# Altium PCB fisica_PCB2.PcbDoc
Units mm, origin at the board's own origin, x right, y up, seen from the top; angles counter-clockwise.
Board outline 82 x 32 mm, 2 copper layers (Top Layer, Bottom Layer); 16 components, 7 nets, 36 pads, 0 vias.
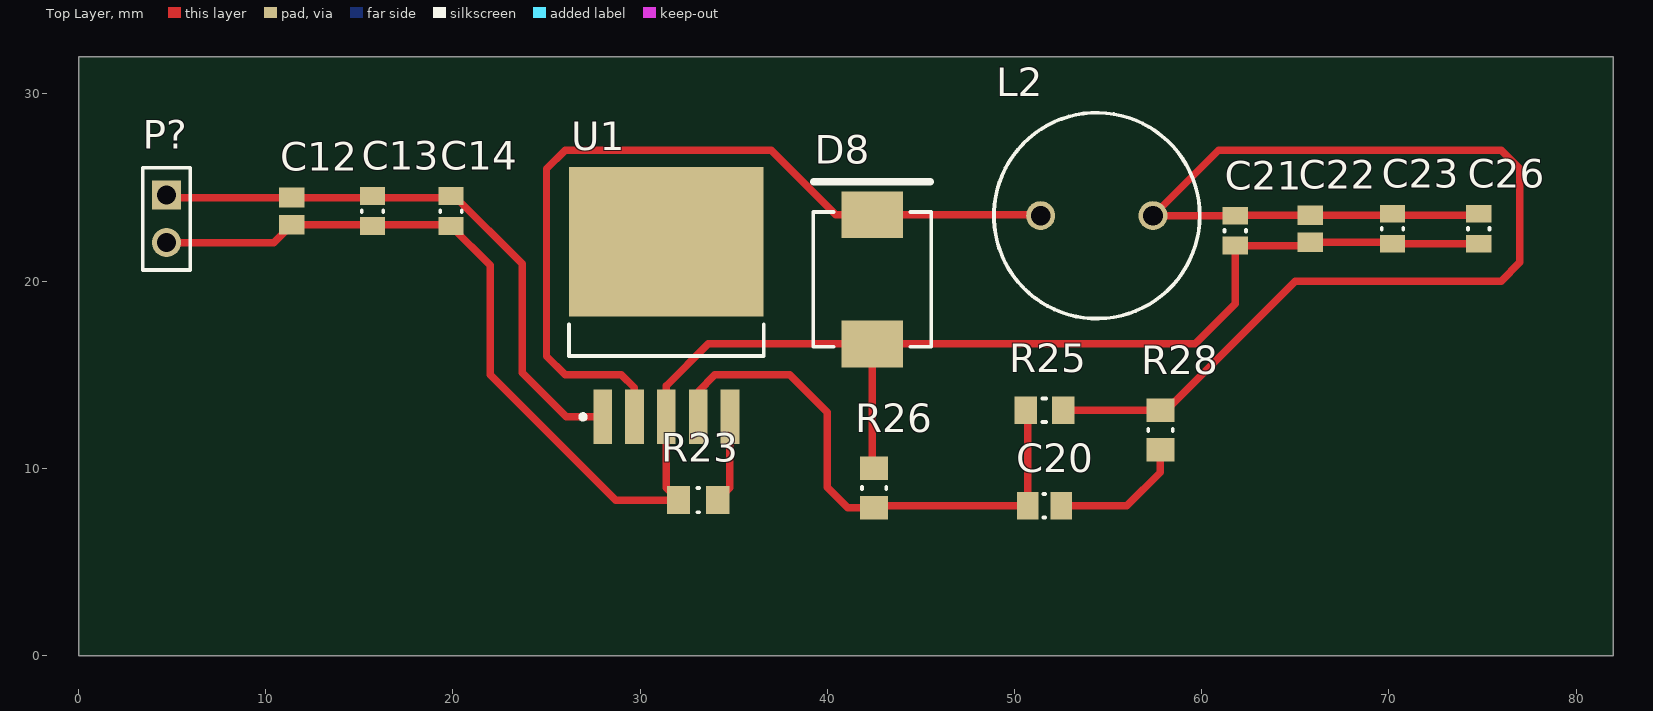
[diagram p0: Top Layer view]
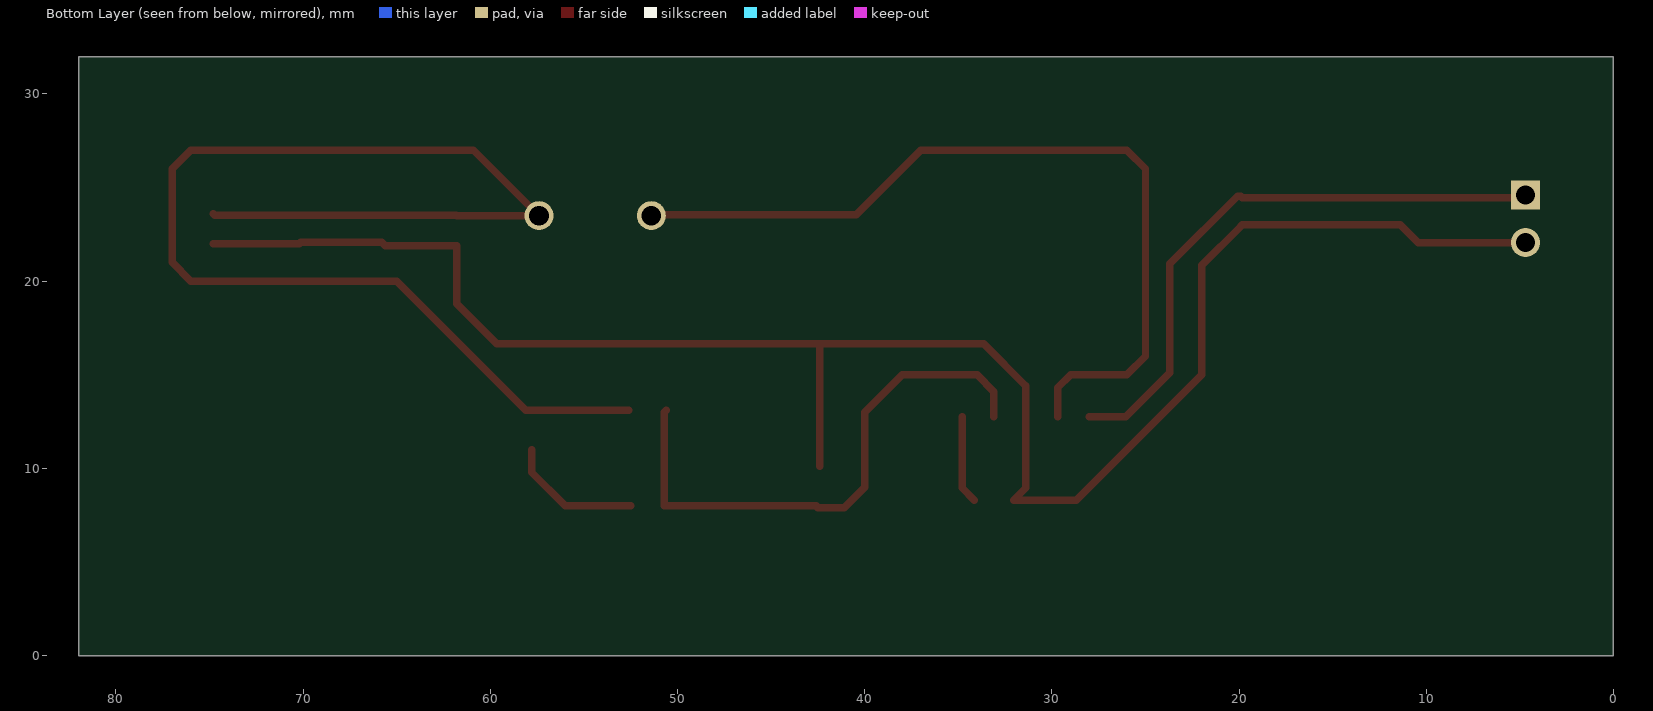
[diagram p1: Bottom Layer view, seen from below]

## Layer stack, top to bottom
Top Solder: solder mask 0.0102, Solder Resist, Dk 3.5
Top Layer: signal copper 0.0356
Dielectric 1: dielectric 0.32, FR-4, Dk 4.8
Bottom Layer: signal copper 1
Bottom Solder: solder mask 0.0102, Solder Resist, Dk 3.5

## Board outline
0,0 82,0 82,32 0,32

## Design rules (kind name [scope] priority, off if disabled: settings)
Clearance [All] p1: gap=0.25 ignorepadtopadclearanceinfootprint=TRUE
PolygonConnect [All] p1: connectstyle=Relief reliefconductorwidth=0.254 reliefentries=4 polygonreliefangle="90 Angle" airgapwidth=0.254
RoutingVias [All] p1: holewidth=0.711 width=1.27 viastyle="Through Hole" minholewidth=0.711 minwidth=1.27 maxholewidth=0.711 maxwidth=1.27
SolderMaskExpansion [All] p1: expansion=0.102
Width [All] p1: maxlimit=0.5 minlimit=0.254 preferedwidth=0.4
30 further rules are at their usual default settings.

## Components (designator, comment, footprint, x,y, rotation, side; value= is the part's Value field where it differs from the comment)
C12 "crear 100uF" CAPC2013X145X45LL20T25 11.39,23.743 r90 top
C13 "22nF  0805" CAPC0805(2012)100_L 15.708,23.742 r90 top value=22nF
C14 "470nF 0805" CAPC0805(2012)100_L 19.899,23.742 r90 top value=1uF
C20 "3.3nF 0805" CAPC0805(2012)100_N 51.6,8 r0 top value=3.3nF
C21 "470nF 0805" CAPC0805(2012)100_L 61.8,22.7 r90 top value=1uF
C22 "crear  330uF" CAPC2013X145X45LL20T25 65.8,22.8 r90 top
C23 "220nF 100V 0805" CAPC0805(2012)75_L 70.2,22.8 r90 top value=220nF
C26 "470nF 0805" CAPC0805(2012)100_L 74.8,22.8 r90 top value=1uF (schematic designator C24)
D8 "B550C-13-F" DIOD-SMC-2-A_V 42.4,20.1 r90 top
L2 "crear" COIL-RFB1010-2_V 54.4,23.5 r0 top
P? "TSW-102-26-L-S" SMTC-TSW-102-26-XX-S 4.7,24.6 r270 top
R23 "1K  0805" RESC0805(2012)_M 33.1,8.3 r0 top value="1780.00 Ohm"
R25 "3.3k 0805" RESC2013X60X35ML10T20 51.6,13.1 r0 top
R26 "1K  0805" RESC0805(2012)_M 42.5,8.95 r270 top value="1780.00 Ohm"
R28 "100  0805" RESC0805(2012)_M 57.8,12.05 r90 top value="1780.00 Ohm"
U1 "LM2596SX-12" TS5B_L 31.4,18.7 r90 top

## Footprints (in the part's own frame and the unit in brackets; to place one, negate y for a bottom-side part, rotate by r counter-clockwise, add the part's x,y. Pads: shape width x height; smd on the part's side, far side on the other; paste and mask are expansions set on the pad)
CAPC0805(2012)75_L [mm] "Chip Capacitor, Body 2.0x1.2mm, Height 0.75mm, IPC High Density"
  rect 0.95x1.35 smd: 1(-0.8,0) 2(0.8,0)
  silkscreen extent -0.05,-0.58 0.05,0.58, body extent -1.1,-0.72 1.1,0.72, height 0.75
CAPC0805(2012)100_L [mm] "Chip Capacitor, Body 2.0x1.2mm, Height 1.0mm, IPC High Density"
  rect 0.95x1.35 smd: 1(-0.8,0) 2(0.8,0)
  silkscreen extent -0.05,-0.58 0.05,0.58, body extent -1.1,-0.72 1.1,0.72, height 1
CAPC0805(2012)100_N [mm] "Chip Capacitor, Body 2.0x1.2mm, Height 1.0mm, IPC Medium Density"
  rect 1.15x1.45 smd: 1(-0.9,0) 2(0.9,0)
  silkscreen extent -0.05,-0.62 0.05,0.63, body extent -1.1,-0.72 1.1,0.73, height 1
CAPC2013X145X45LL20T25 [mm] "Chip Capacitor, 2-Leads, Body 2.00x1.25mm, IPC High Density"
  rect 1.05x1.35 smd: 1(-0.725,0) 2(0.725,0)
  body extent -1.1,-0.72 1.1,0.72, height 1.45
COIL-RFB1010-2_V [mm] "Radial Leaded, 2-Leads, Dia 11mm, Height 11.5mm, Pin Spacing 6mm"
  round 1.55 hole 1.05: 1(-3,0) 2(3,0)
  Mechanical 13 keep-out circle w0.1: c0,0 r5.5
  silkscreen extent -5.5,-5.5 5.5,5.5, body extent -5.5,-5.5 5.5,5.5, height 11.5
DIOD-SMC-2-A_V [mm] "Molded Diode, 2-Leads, Body 7.11 x 6.22 mm"
  rect 2.5x3.3 smd: 1(-3.45,0) 2(3.45,0)
  silkscreen extent -3.6,-3.15 5.2,3.15, body extent -3.77,-3.11 3.77,3.11, height 2.5
RESC0805(2012)_M [mm] "Chip Resistor, Body 2.0x1.3mm, IPC Low Density"
  rect 1.25x1.5 smd: 1(-1.05,0) 2(1.05,0)
  silkscreen extent -0.05,-0.65 0.05,0.65, body extent -1.1,-0.67 1.1,0.67, height 0.7
RESC2013X60X35ML10T20 [mm] "Chip Resistor, 2-Leads, Body 2.1x1.35mm, IPC Low Density"
  rect 1.2x1.45 smd: 1(-1,0) 2(1,0)
  silkscreen extent -0.1,-0.63 0.1,0.63, body extent -1.05,-0.68 1.05,0.67, height 0.6
SMTC-TSW-102-26-XX-S [mm] ".025 SQ Post Terminal Strip Assembly, 1x2 Pins, Vertical, 2.54mm Pitch, Male"
  rect 1.55x1.55 hole 1.02: 1(0,0)
  round 1.55 hole 1.02: 2(2.54,0)
  silkscreen extent -1.46,-1.27 4,1.27, body extent -1.4,-1.27 3.81,1.27, height 8.38
TS5B_L [mm] "D2-PAK, 6-Leads, Body 8.6x10.2mm, Pitch 1.7mm, Lead Span 14.1mm, IPC High Density"
  rect 2.9x1 smd: 1(-5.95,3.4) 2(-5.95,1.7) 3(-5.95,0) 4(-5.95,-1.7) 5(-5.95,-3.4)
  rect 8x10.4 smd: 6(3.4,0)
  silkscreen extent -6.07,-5.2 -1,5.2, body extent -2.7,-5.2 6.19,5.2, height 4.65

## Part data
C12 C22: library part CMP-2000-07599-1, "Chip Capacitor, 100 uF, +/- 20%, 6.3 V, -55 to 85 degC, 0805 (2012 Metric), RoHS, Tape and Reel", Capacitance=100uF, Case/Package=0805, Case Code (Metric)=2012, Dielectric=X5R, Manufacturer=Murata, Max Operating Temperature=85degC, Min Operating Temperature=-55degC, Package Description="2-Pin Surface Mount Device, Body 2 x 1.25 mm", Package Reference=805, Tolerance=20%, Voltage Rating=6.3V, Case Code (Imperial)=0805, Datasheet URL=http://search.murata.co.jp/Ceramy/image/img/A01X/G101/ENG/GRM21BR60J107ME15-01.pdf, Datasheet Version=03/2016, Lead Free=LeadFree, Length=0.079inch, Manufacturer URL=http://www.murata.com/, Mount=SurfaceMount, Mounting Technology=SurfaceMount, Packaging=CutTape, REACH SVHC=NoSVHC, RoHSCompliant=True, Thickness=0.057inch, Voltage Rating (DC)=6.3V, Width=0.049inch
C13: library part CMP-1036-04079-1, "CAP 22nF 100V ±20% 0805 (2012 Metric) Thickness 1mm SMD", Case-EIA=0805, Case-Metric=2012, Rated Voltage="100 V", Tolerance=±20%, Max Thickness="1 mm", Technology=SMT
C14 C21 C26: library part CMP-1036-04734-1, "CAP 1uF 6.3V ±20% 0805 (2012 Metric) Thickness 1mm SMD", Case-EIA=0805, Case-Metric=2012, Rated Voltage="6.3 V", Tolerance=±20%, Max Thickness="1 mm", Technology=SMT
C20: library part CMP-1036-03429-1, "CAP 3.3nF 100V ±1% 0805 (2012 Metric) Thickness 1mm SMD", Case-EIA=0805, Case-Metric=2012, Rated Voltage="100 V", Tolerance=±1%, Max Thickness="1 mm", Technology=SMT
C23: library part CMP-1036-04526-1, "CAP 220nF 10V ±20% 0805 (2012 Metric) Thickness 0.75mm SMD", Case-EIA=0805, Case-Metric=2012, Rated Voltage="10 V", Tolerance=±20%, Max Thickness="0.75 mm", Technology=SMT
D8: library part CMP-2000-05906-1, "Schottky Barrier Rectifier / , 50 V, 5 A, -55 to 150 degC, 2-Pin SMD, RoHS, Tape and Reel", If - Forward Current=5A, Ifsm - Forward Surge Current=100A, Ir - Reverse Current=500uA, Manufacturer=DiodesIncorporated, Maximum Operating Temperature=+125C, Minimum Operating Temperature=-55C, Operating Temperature Range=-55Cto+125C, Package / Case=SMC, Package Description="2-Pin Surface Mount Device, Body 6.855 x 5.905 mm", Vf - Forward Voltage=0.7V, Vrrm - Repetitive Reverse Voltage=50V, Brand=DiodesIncorporated, Configuration=Single, Datasheet URL=http://www.diodes.com/_files/datasheets/ds13012.pdf, Datasheet Version="Rev. 17-2, 07/2015", Factory Pack Quantity=3000, Height=2.5mm, Length=7.11mm, Manufacturer URL=http://www.diodes.com/, Mounting Style=SMD/SMT, Mounting Technology=SurfaceMount, Package Reference=SMC, Packaging=Reel, Product=SchottkyDiodes, Product Category=SchottkyDiodes&Rectifiers, RoHS=True, Series=B550, Technology=Si, Termination Style=SMD/SMT, Type=SchottkyBarrierRectifier, Unit Weight=0.007408oz, Width=6.22mm
L2: library part CMP-0899-00031-1, "Power Inductor, 470 uH +/- 10%, 0.9 A, -40 to 125 degC, 2-Pin Radial Leaded, Dia 11 mm, RoHS, Tray", Ambient Temperature Range="-40 to 125 degC", Inductance="470 uH", Manufacturer=Coilcraft, PartNumber=RFB1010-471L, Tolerance=10%, ComponentLink1Description="Manufacturer URL", ComponentLink1URL=http://www.coilcraft.com/, ComponentLink2Description=Datasheet, ComponentLink2URL=http://www.coilcraft.com/pdfs/rfb.pdf, DatasheetVersion=Sep-13, DCR="0.81 Ohm Max.", Irms="1.2 A @40 degC", Isat="0.9 A", Mounting Technology="Through Hole", PackageDescription="2-Pin Radial Leaded, Dia 11 mm, Height 11.5 mm, Radial 6 mm", PackageReference=RFB1010-2, Packing=Tray, RoHS=TRUE, SRF="3 MHz"
P?: library part CMP-1024-00330-1, "0.025\" SQ Post Header, Through-hole, Vertical, -55 to 125 degC, 2.54 mm Pitch, 2-Pin, Male, RoHS", Manufacturer=Samtec, Temperature Range="-55 to 125 degC", ComponentLink1Description="Manufacturer URL", ComponentLink1URL=http://www.samtec.com, ComponentLink2Description=Datasheet, ComponentLink2URL=http://www.samtec.com/documents/webfiles/pdf/TSW_TH.PDF, ComponentLink3Description="Package Specification", ComponentLink3URL=http://www.samtec.com/documents/webfiles/cpdf/TSW-XXX-XX-XXX-X-XX-XXX-MKT.pdf, DatasheetVersion=F-214, Mounting Technology=Through-hole, Orientation=Vertical, PackageDescription=".025[0.64] SQ. Post Terminal Strip Assembly", PackageReference=TSW-102-26-XX-S, PackageVersion="DM, 8/1988", PartNumber=TSW-102-26-L-S, Pitch="2.54 mm", RoHS=True
R23 R26 R28: library part CMP-1013-00536-1, "1K78 0.125W 1% 0805 (2012 Metric)  SMD", Case-EIA=0805, Case-Metric=2012, Power="0.125 W", Tolerance="1 %", Technology=SMT
R25: library part CMP-2100-03672-1, "Chip Resistor, 3.3 KOhm, +/- 1%, 0.125 W, -55 to 155 degC, 0805 (2012 Metric), RoHS, Tape and Reel", Case/Package=0805, Case Code (Metric)=2012, Manufacturer=Yageo, Max Operating Temperature=155degC, Max Power Dissipation=125mW, Min Operating Temperature=-55degC, Package Description="2-Pin Surface Mounted Device, Body 2 x 1.25 mm", Package Quantity=1, Resistance=3.3KOhm, Temperature Coefficient=100ppm/degreesC, Tolerance=1%, Voltage Rating=150V, Case Code (Imperial)=0805, Composition=ThickFilm, Datasheet URL=http://www.yageo.com/NewPortal/yageodocoutput?fileName=/pdf/R-Chip/PYu-RC_Group_51_RoHS_L_5.pdf, Datasheet Version="Rev. 5, 10/2016", Depth=1.25mm, Height=0.5mm, Lead Free=LeadFree, Length=2mm, Manufacturer URL=http://www.yageo.com/, Number of Terminations=2, Package Reference=0805, Packaging=TapeandReel, Power Rating=125mW, REACH SVHC=NoSVHC, RoHSCompliant=true, Termination=SMD/SMT, Weight=0.000194oz, Width=0.049inch
U1: library part CMP-0069-00277-2, "SIMPLE SWITCHER® Power Converter 150 KHz 3A Step-Down Voltage Regulator, 5-pin TO-263", Manufacturer="National Semiconductor", PackageTopMarking="NSUZXYTTE#*LM2596S*-12 P+", PowerWise=N, Code_JEDEC=MO-169-AB, ComponentLink1Description="LM2596 Datasheet", ComponentLink1URL=http://www.national.com/ds/LM/LM2596.pdf, ComponentLink2Description="LM2596 Web Page", ComponentLink2URL=http://www.national.com/pf/LM/LM2596.html, ComponentLink3Description="TS5B Package Page", ComponentLink3URL=http://www.national.com/packaging/folders/ts5b.html, CompType=Switcher, DatasheetVersion=May-2002, PackageDescription="TO-263, Molded, .400 x .390 x .180in, 5 Lead, .067in Pitch, Surface Mount", PackageReference=TS5B, PackageVersion="revD, Apr-2005", PinCount=5, RevisionNote="Component URLs added", RoHS=N

## Nets (pads, with @x,y where several pads share a name; then routed paths per layer and width w, separated by ;. In a path a pad name is that pad's centre, name@x,y a point inside that pad or via, vN(x,y) a via of type N, cw(c..) or ccw(c..) an arc to the next point about the centre after c; other vN are vias at no path point)
12V: C12.2 C13.2 C14.2 P?.1 U1.1 | length 31.7
  Top Layer w0.4: P?.1 4.832,24.468 C12.2 19.825,24.468 C14.2 20.085,24.542 23.7,20.927 23.7,15.1 26.05,12.75 U1.1
GND: C12.1 C13.1 C14.1 C21.1 C22.1 C23.1 C26.1 D8.1 P?.2 R23.1 R26.1 U1.3 | length 98.6
  Top Layer w0.4: P?.2 10.432,22.06 C12.1 19.823,23.018 C14.1 22,20.841 22,15 28.7,8.3 R23.1 31.4,8.95 U1.3 31.4,14.4 33.65,16.65 D8.1 ; R26.1@42.4,10.1 D8.1 ; C26.1 C23.1 70.125,22.075 C22.1 65.625,21.9 C21.1 61.8,18.8 59.65,16.65 D8.1
NetC20_1: C20.1 R25.1 R26.2 U1.4 | length 29.8
  Top Layer w0.4: U1.4 33.1,14.1 34,15 38,15 40,13 40,9 41.1,7.9 R26.2 42.6,8 C20.1 50.7,13 R25.1
NetC20_2: C20.2 R28.1 | length 7.2
  Top Layer w0.4: C20.2 56,8 57.8,9.8 R28.1
NetC21_2: C21.2 C22.2 C23.2 C26.2 L2.2 R25.2 R28.2 | length 71.6
  Top Layer w0.4: R25.2 R28.2 58.1,13.1 65,20 76,20 77,21 77,26 76,27 60.9,27 L2.2 C21.2 61.825,23.525 C22.2 74.725,23.525 C26.2
NetD8_2: D8.2 L2.1 U1.2 | length 45.2
  Top Layer w0.4: U1.2 29.7,14.3 29,15 26,15 25,16 25,26 26,27 37,27 40.45,23.55 D8.2 51.35,23.55 L2.1
NetR23_2: R23.2 U1.5 | length 4.7
  Top Layer w0.4: R23.2 34.8,8.95 U1.5
pads on no net: U1.6